# Altium PCB PCB1.PcbDoc
Units mil, origin at the board's own origin, x right, y up, seen from the top; angles counter-clockwise.
Board outline 1125 x 2025 mil, 2 copper layers (Top Layer, Bottom Layer); 32 components, 37 nets, 133 pads, 46 vias.
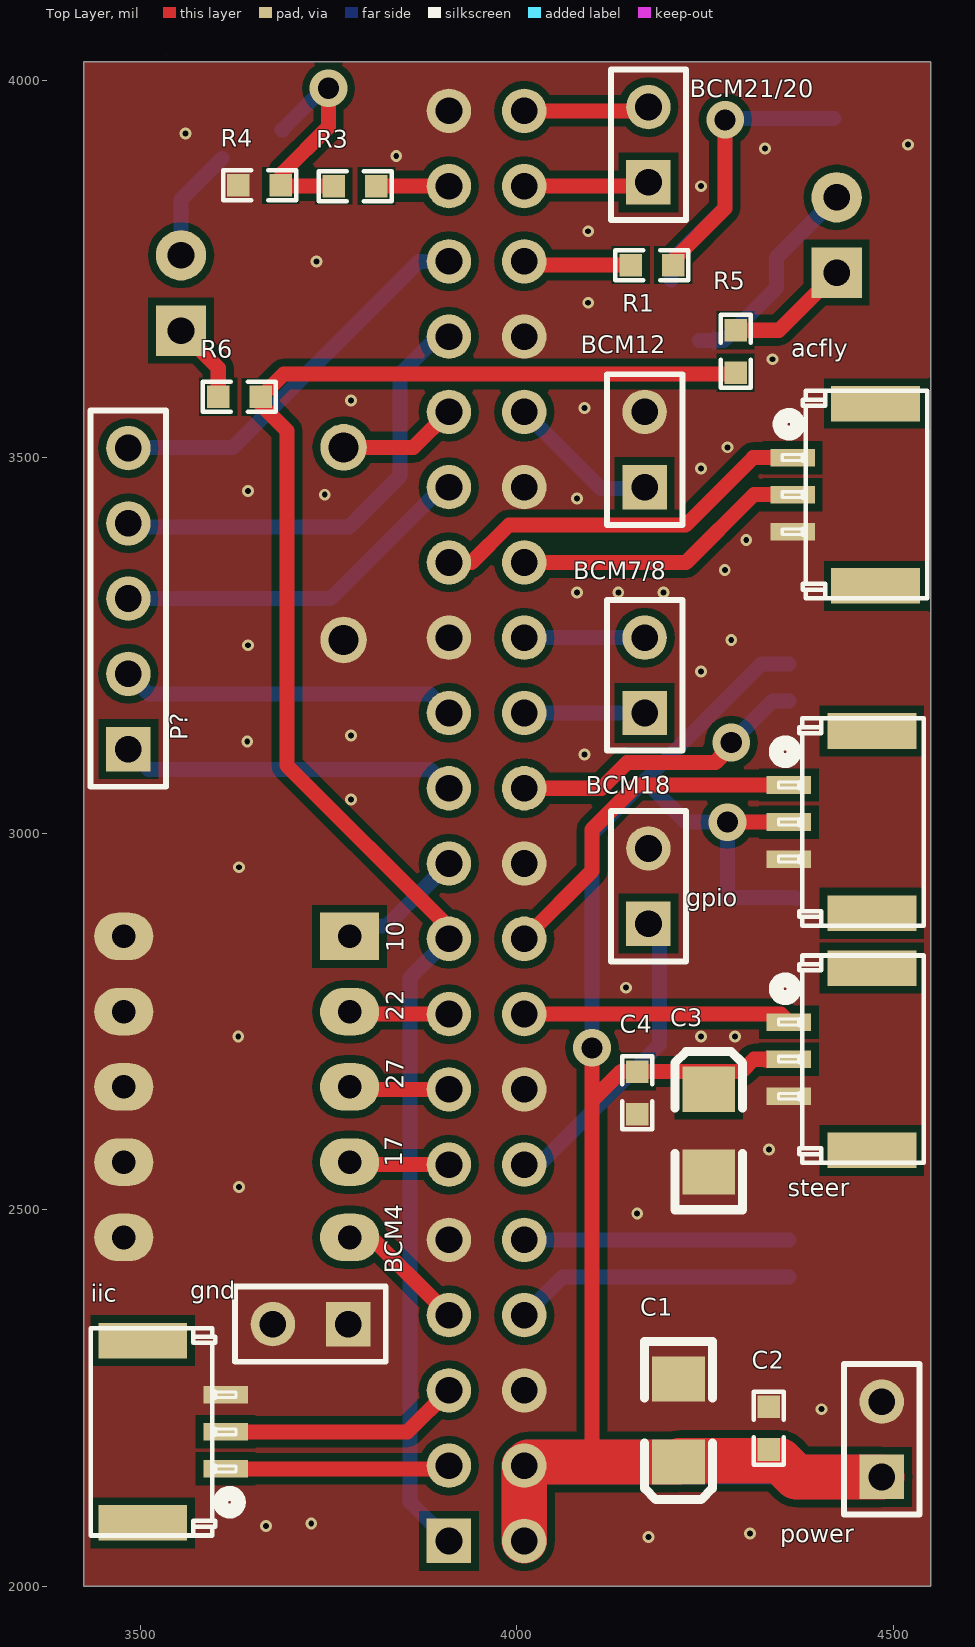
[diagram p0: Top Layer view]
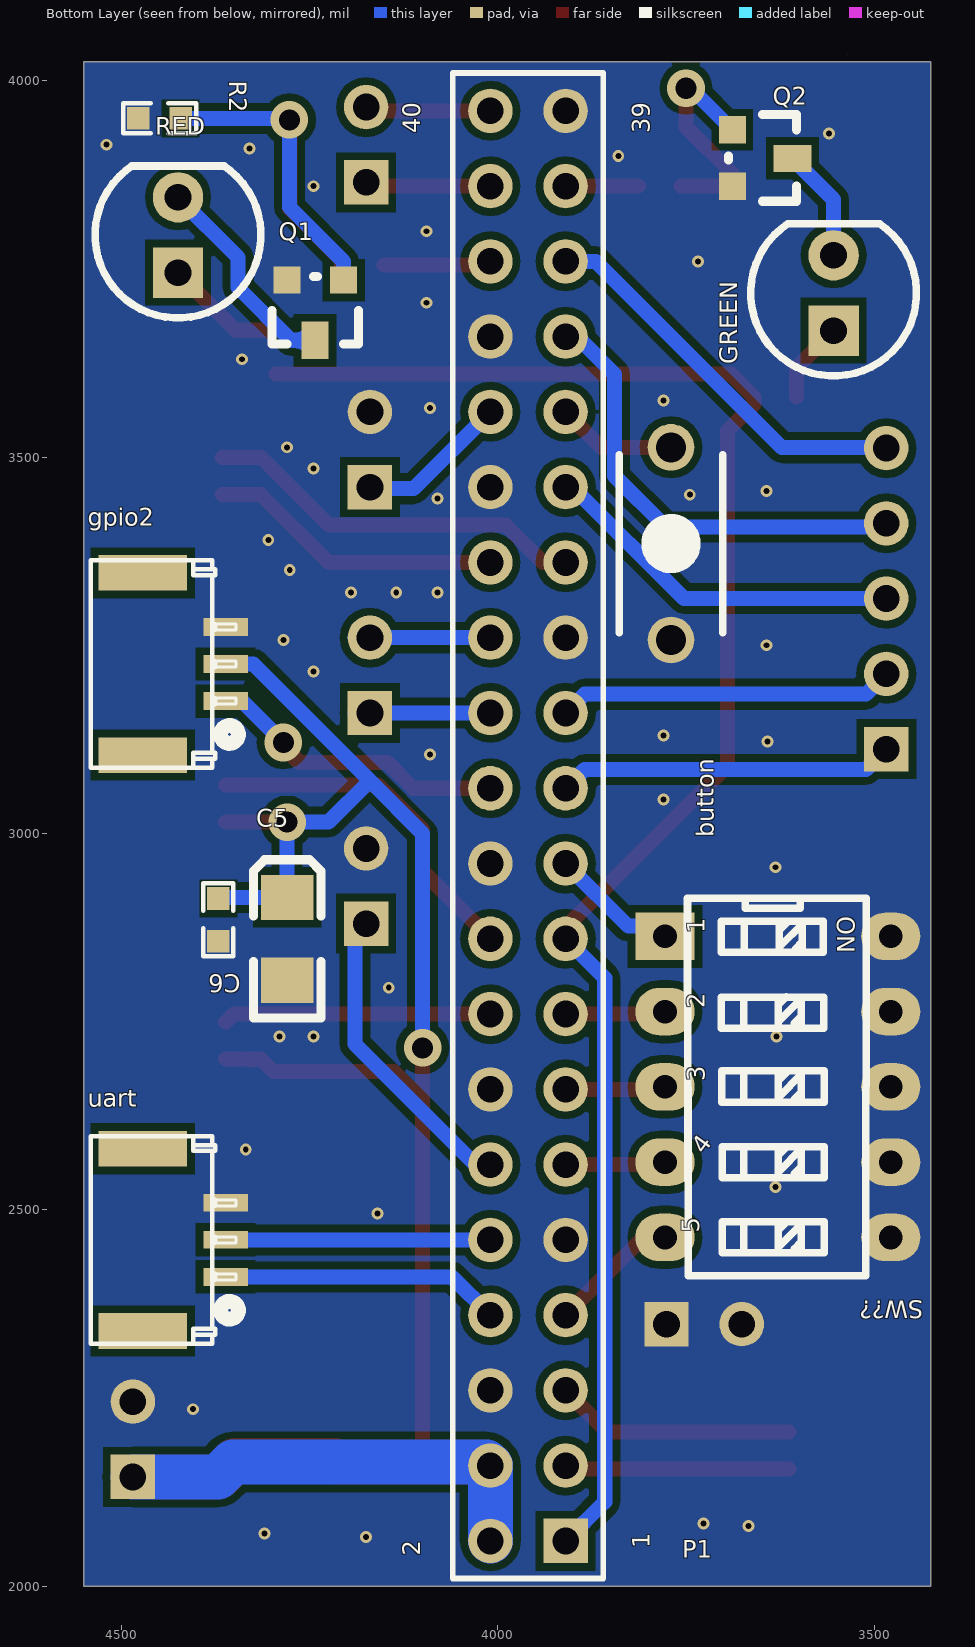
[diagram p1: Bottom Layer view, seen from below]

## Layer stack, top to bottom
Top Solder: solder mask 0.4, Solder Resist, Dk 3.5
Top Layer: signal copper 1.4
Dielectric 1: dielectric 12.6, FR-4, Dk 4.8
Bottom Layer: signal copper 1.4
Bottom Solder: solder mask 0.4, Solder Resist, Dk 3.5

## Board outline
3425,2000 3425,4025 4550,4025 4550,2000
cut-out: 3535,4035

## Design rules (kind name [scope] priority, off if disabled: settings)
Clearance [All] p1: gap=10 ignorepadtopadclearanceinfootprint=FALSE except(0: Arc-Hole Track-Hole SMDPad-Hole THPad-Hole Via-Hole Fill-Hole Poly-Hole Region-Hole Text-Hole)
HoleToHoleClearance [All] p1: gap=0 allowstackedmicrovias=TRUE
MinimumSolderMaskSliver [All] p1: minsoldermaskwidth=0
PolygonConnect [All] p1: connectstyle=Direct reliefconductorwidth=10 reliefentries=4 polygonreliefangle="90 Angle" airgapwidth=10
RoutingVias [All] p1: holewidth=28 width=50 viastyle="Through Hole" minholewidth=28 minwidth=50 maxholewidth=28 maxwidth=50
SilkToSilkClearance [All] p1: silktosilkclearance=0
SilkToSolderMaskClearance [IsPad] p1: minsilkscreentomaskgap=0 clearancetoexposedcopper=TRUE
SolderMaskExpansion [All] p1: expansion=4
Width [All] p1: maxlimit=150 minlimit=10 preferedwidth=20 minimp=50.000000 maximp=50.000000 favimp=50.000000
26 further rules are at their usual default settings.

## Components (designator, comment, footprint, x,y, rotation, side; value= is the part's Value field where it differs from the comment)
acfly "Header 3" GH1.25-LS-3P 4465,3450 r90 top
BCM7/8 "Header 2" HDR1X2 4170,3160 r90 top
BCM12 "Header 2" HDR1X2 4170,3460 r90 top
BCM18 "Header 2" HDR1X2 4175,2880 r90 top
BCM21/20 "Header 2" HDR1X2 4175,3865 r90 top
button "SW_PUSH" KEY_3x6 3770,3385 r270 bottom
C1 "47uF" 3216 4215,2205 r270 top
C2 "100nF" 0603P 4335,2210 r270 top
C3 "47uF" 3216 4255,2620 r90 top
C4 "100nF" 0603P 4160,2655 r90 top
C5 "47uF" 3216 4280,2875 r90 bottom
C6 "100nF" 0603P 4371.44,2885 r90 bottom
gnd "Header 2" HDR1X2 3776,2348 r180 top
gpio "Header 3" GH1.25-LS-3P 4460,3015 r90 top
gpio2 "Header 3" GH1.25-LS-3P 4460,3225 r270 bottom
GREEN "LED?" "LED 5MM-G" 3554,3718 r90 bottom
iic "Header 3" GH1.25-LS-3P 3515,2205 r270 top
P1 "Header 20X2" HDR2X20 3910,2060 r90 bottom locked
P? "Header 5" HDR1X5 3484,3112 r90 top
power "Battery" HDR1X2 4485,2145 r90 top
Q1 "SI2302 SOT23" SOT-23 4205,3735 r0 bottom
Q2 "SI2302 SOT23" SOT-23 3688.5,3934.87 r270 bottom
R1 "100R" 0603P 4180,3755 r180 top
R2 "100K" 0603P 4450,3950 r180 bottom
R3 "100R" 0603P 3785,3860 r0 top
R4 "100K" 0603P 3658,3861 r0 top
R5 "200R" 0603P 4290.85,3640 r90 top
R6 "200R" 0603P 3632,3580 r180 top
RED "LED?" "LED 5MM-R" 4425,3795 r90 bottom
steer "Header 3" GH1.25-LS-3P 4460,2700 r90 top
SW?? "DIP SWITCH-05" "DIP SWITCH-05" 3628,2663 r270 bottom
uart "Header 3" GH1.25-LS-3P 4460,2460 r270 bottom

## Footprints (in the part's own frame and the unit in brackets; to place one, negate y for a bottom-side part, rotate by r counter-clockwise, add the part's x,y. Pads: shape width x height; smd on the part's side, far side on the other; paste and mask are expansions set on the pad)
0603P [mil]
  rect 30x30 smd: 1(-28,0) 2(28.5,-0.06)
  silkscreen extent -48,-20 49,20
3216 [mil]
  rect 60x70 smd: 1(40,0) 2(-70,0)
  silkscreen extent -120,-45 90,45
"DIP SWITCH-05" [mm]
  rect 1.6x2 hole 0.8: 1(-5.086,-3.81)
  oval 1.6x2 hole 0.8: 2(-2.546,-3.81) 3(-0.006,-3.81) 4(2.534,-3.81) 5(5.074,-3.81) 6(5.074,3.81) 7(2.534,3.81) 8(-0.006,3.81) 9(-2.546,3.81) 10(-5.086,3.81)
  silkscreen extent -6.37,-3.05 6.37,2.98
GH1.25-LS-3P [mm] "A1257WR-S-3P"
  rect 1.2x3 smd: 0(-3.075,-0.3) 0(3.075,-0.3)
  rect 0.6x1.5 smd: 1(1.25,2.5) 2(0,2.5) 3(-1.25,2.5)
  silkscreen extent -3.5,-2.05 3.5,2.93, body extent -3.5,-2.15 3.5,2.25, height 4.2
HDR1X2 [mm] "Connector; Header; 2 Position"
  rect 1.5x1.5 hole 0.9: 1(0,0)
  round 1.5 hole 0.9: 2(2.54,0)
  silkscreen extent -1.27,-1.27 3.81,1.27
HDR1X5 [mm] "Connector; Header; 5 Position"
  rect 1.5x1.5 hole 0.9: 1(0,0)
  round 1.5 hole 0.9: 2(2.54,0) 3(5.08,0) 4(7.62,0) 5(10.16,0)
  silkscreen extent -1.27,-1.27 11.43,1.27
HDR2X20 [mm] "Connector; Header; 20x2 Position"
  rect 1.5x1.5 hole 0.9: 1(0,0)
  round 1.5 hole 0.9: 2(0,2.54) 3(2.54,0) 4(2.54,2.54) 5(5.08,0) 6(5.08,2.54) 7(7.62,0) 8(7.62,2.54) 9(10.16,0) 10(10.16,2.54) 11(12.7,0) 12(12.7,2.54) 13(15.24,0) 14(15.24,2.54) 15(17.78,0) 16(17.78,2.54) 17(20.32,0) 18(20.32,2.54) 19(22.86,0) 20(22.86,2.54) 21(25.4,0) 22(25.4,2.54) 23(27.94,0) 24(27.94,2.54) 25(30.48,0) 26(30.48,2.54) 27(33.02,0) 28(33.02,2.54) 29(35.56,0) 30(35.56,2.54) 31(38.1,0) 32(38.1,2.54) 33(40.64,0) 34(40.64,2.54) 35(43.18,0) 36(43.18,2.54) 37(45.72,0) 38(45.72,2.54) 39(48.26,0) 40(48.26,2.54)
  silkscreen extent -1.27,-1.27 49.53,3.81
KEY_3x6 [mil] "KEY_MID"
  round 62 hole 40: 1(-127.95,0) 2(127.95,0)
  silkscreen extent -118,-69 118,69
"LED 5MM-G" [mm] "绿色5mm直插LED"
  rect 1.7x1.7 hole 0.9: 1(-1.27,0)
  round 1.7 hole 0.9: 2(1.27,0)
  silkscreen extent -2.8,-2.8 2.33,2.8, body extent -1.98,-0.8 2.08,0.8, height 4.5
"LED 5MM-R" [mm] "红色5mm直插LED"
  rect 1.7x1.7 hole 0.9: 1(-1.27,0)
  round 1.7 hole 0.9: 2(1.27,0)
  silkscreen extent -2.8,-2.8 2.33,2.8, body extent -1.98,-0.8 2.08,0.8, height 4.5
SOT-23 [mil]
  rect 36x36 smd: 1(0,0) 2(75,0)
  rect 36x50 smd: 3(38,80)
  silkscreen extent -20,-5 95,85

## Part data
acfly gpio gpio2 iic steer uart: "Header, 3-Pin", LatestRevisionDate=17-Jul-2002, LatestRevisionNote="Re-released for DXP Platform.", Publisher="Altium Limited"
BCM7/8 BCM12 BCM18 BCM21/20 gnd: "Header, 2-Pin", LatestRevisionDate=17-Jul-2002, LatestRevisionNote="Re-released for DXP Platform.", Publisher="Altium Limited"
button: library part KEY
C1 C3 C5: library part CAP
C2 C4 C6: library part C
GREEN RED: library part LED
P1: "Header, 20-Pin, Dual row", LatestRevisionDate=17-Jul-2002, LatestRevisionNote="Re-released for DXP Platform.", Publisher="Altium Limited"
P?: "Header, 5-Pin", LatestRevisionDate=17-Jul-2002, LatestRevisionNote="Re-released for DXP Platform.", Publisher="Altium Limited"
power: library part "Header 2", "Header, 2-Pin", LatestRevisionDate=17-Jul-2002, LatestRevisionNote="Re-released for DXP Platform.", Publisher="Altium Limited"
Q1 Q2: library part NMOS
R1 R2 R3 R4 R5 R6: library part R

## Via types
v1: diameter 15.75, hole 7.87, Top Layer to Bottom Layer, 41 vias
v2: diameter 50, hole 28, Top Layer to Bottom Layer, 5 vias

## Nets (pads, with @x,y where several pads share a name; then routed paths per layer and width w, separated by ;. In a path a pad name is that pad's centre, name@x,y a point inside that pad or via, vN(x,y) a via of type N, cw(c..) or ccw(c..) an arc to the next point about the centre after c; other vN are vias at no path point)
+3V3: P1.1 P1.17 R5.1 R6.1 | length 2314.3
  Top Layer w20: P1.17 3910,2875 3695,3090 3695,3535 3660,3570 R6.1 3690.47,3610.47 R5.1@4295,3610.47
  Bottom Layer w20: P1.1 3858,2112 3858,2808 P1.17
+5V: C1.1 C2.2 C3.1 C4.2 C5.1 C6.2 gpio2.2 gpio.2 P1.2 P1.4 power.1 steer.2 | length 3066.5
  Top Layer w20: 4100,2165 4100,2645 ; v2(4100,2715) 4100,2645 ; v2@4270.06,3024.94 v2(4280,3015) gpio.2 ; steer.2 4315,2700 4298.5,2683.5 C4.2 4138.5,2683.5 4100,2645
  Top Layer w60: P1.2 P1.4 4015,2165 4100,2165 C1.1 4216.5,2166.5 4349.94,2166.5 4371.44,2145 power.1
  Bottom Layer w20: v2(4100,2715) 4100,3000 4170,3070 ; gpio2.2 4325,3225 4170,3070 ; C6.2 4369.87,2915 C5.1 v2(4280,3015) 4225,3015 4170,3070
  Bottom Layer w60: P1.2 P1.4 4015,2165 4352,2165 4372,2145 power.1
BCM0: acfly.1 P1.27 | length 514.2
  Top Layer w20: P1.27 3939.96,3360 3989.49,3409.53 4224.53,3409.53 4314.21,3499.21 acfly.1
BCM1: acfly.2 P1.28 | length 393.9
  Top Layer w20: P1.28 4225,3360 4315,3450 acfly.2
BCM2: iic.1 P1.3 | length 298.3
  Top Layer w20: iic.1 3905.79,2155.79 P1.3
BCM3: iic.2 P1.5 | length 319.4
  Top Layer w20: iic.2 3855,2205 P1.5
BCM4: P1.7 SW??.5 | length 171.4
  Top Layer w20: SW??.5@3787,2476.76 3793.24,2476.76 P1.7
BCM5: P1.29 P?.3 | length 487.3
  Bottom Layer w20: P?.3 3752.83,3312 3900.83,3460 P1.29
BCM6: button.1 P1.31 | length 159.5
  Top Layer w20: button.1 3862.95,3512.95 P1.31
BCM7: BCM7/8.2 P1.26 | length 180
  Bottom Layer w20: P1.26 BCM7/8.2@4190,3260
BCM8: BCM7/8.1 P1.24 | length 180
  Bottom Layer w20: P1.24 BCM7/8.1@4190,3160
BCM9: P1.21 P?.1 | length 447.5
  Bottom Layer w20: P?.1 3511,3085 3885,3085 P1.21
BCM10: P1.19 SW??.1 | length 157.5
  Bottom Layer w20: SW??.1@3787,2876.76 3826.76,2876.76 P1.19
BCM11: P1.23 P?.2 | length 447.5
  Bottom Layer w20: P?.2 3511,3185 3885,3185 P1.23
BCM12: BCM12.1 P1.32 | length 202.3
  Bottom Layer w20: P1.32 4112.05,3457.95 BCM12.1@4170,3457.95
BCM13: P1.33 P?.4 | length 611.9
  Bottom Layer w20: P?.4 3489,3407 3777,3407 3845,3475 3845,3610 3895,3660 P1.33
BCM14: P1.8 uart.1 | length 372.6
  Bottom Layer w20: P1.8 4060.79,2410.79 uart.1
BCM15: P1.10 uart.2 | length 351.6
  Bottom Layer w20: P1.10 uart.2
BCM16: P1.36 R1.2 | length 143.5
  Top Layer w20: P1.36 4014.94,3755.06 R1.2
BCM17: P1.11 SW??.4 | length 129.9
  Top Layer w20: SW??.4@3787,2576.76 3803.76,2560 P1.11
BCM18: BCM18.1 P1.12 | length 406.3
  Bottom Layer w20: P1.12 4030,2560 4190,2720 BCM18.1@4190,2880
BCM19: P1.35 P?.5 | length 528.7
  Bottom Layer w20: P?.5 3484.5,3512.5 3622.5,3512.5 3870,3760 P1.35
BCM20: BCM21/20.1 P1.38 | length 167.1
  Top Layer w20: P1.38 4170,3860 BCM21/20.1
BCM21: BCM21/20.2 P1.40 | length 167.1
  Top Layer w20: P1.40 4170,3960 BCM21/20.2
BCM22: P1.15 SW??.2 | length 129.9
  Top Layer w20: SW??.2@3787,2776.76 3803.76,2760 P1.15
BCM23: P1.16 steer.1 | length 356
  Top Layer w20: P1.16 4350.79,2760 steer.1
BCM24: gpio.1 P1.18 | length 468.4
  Top Layer w20: P1.18 4100,2950 4100,3005 4159.21,3064.21 gpio.1
BCM25: gpio2.1 P1.22 | length 403
  Top Layer w20: P1.22 4112.57,3060 4146.79,3094.21 4264.28,3094.21 4285,3114.94 v2(4285,3120.79)
  Bottom Layer w20: v2(4285,3120.79) 4340,3175.79 gpio2.1
BCM26: P1.37 R3.2 | length 96.5
  Top Layer w20: R3.2 3909.94,3859.94 P1.37
BCM27: P1.13 SW??.3 | length 144.9
  Top Layer w20: SW??.3@3787,2676.76 3803.76,2660 P1.13 P1.13@3910,2675
GND: acfly.3 BCM12.2 BCM18.2 button.2 C1.2 C2.1 C3.2 C4.1 C5.2 C6.1 gnd.1 gnd.2 gpio2.3 gpio.3 iic.3 P1.6 P1.9 P1.14 P1.20 P1.25 P1.30 P1.34 P1.39 power.2 Q1.2 Q2.2 R2.1 R4.1 steer.3 SW??.6 SW??.7 SW??.8 SW??.9 SW??.10 uart.3
  other v1: 4175,2065 4310,2070 3667,2080 3727,2083 4405,2235 4160.06,2495 3631,2530 4335,2580 3630,2730 4245,2730 4290,2730 4145,2795 3631,2955 3780,3045 4090,3105 3642,3122 3780,3130 4245,3215 3643,3250 4285,3257.05 4080,3320 4135,3320 4195,3320 4276.5,3350 4305,3390 4080,3445 3745,3450 3643,3455 4245,3485 4280,3512.95 4090,3565 3780,3575 4340,3630 4095,3705 3734,3760 4095,3800 4245,3859.87 3840,3900 4330,3910 4520,3915 3560,3930
NetGREEN_1: GREEN.1 R6.2 | length 108.4
  Top Layer w20: GREEN.1 3603.5,3618.5 R6.2
NetGREEN_2: GREEN.2 Q2.3 | length 151.4
  Bottom Layer w20: GREEN.2 3554,3842.37 Q2.3
NetQ1_1: Q1.1 R1.1 R2.2 | length 609.7
  Top Layer w20: R1.1 4208,3761.63 4276.5,3830.13 4276.5,3947.5 v2(4277,3948)
  Bottom Layer w20: Q1.1 4205,3760 4277,3832 v2(4277,3948) 4278.94,3949.94 R2.2
NetQ1_3: Q1.3 RED.2 | length 284.1
  Bottom Layer w20: Q1.3 4275,3655 4345,3725 4345,3765 RED.2
NetQ2_1: Q2.1 R3.1 R4.2 | length 308.5
  Top Layer w20: v2(3750,3990) 3750,3938.63 3688.5,3877.13 3688.5,3859.87 3688.63,3860 R3.1
  Bottom Layer w20: Q2.1 3743.63,3990 v2(3750,3990)
NetR5_2: R5.2 RED.1 | length 165.8
  Top Layer w20: R5.2 4348.5,3668.5 RED.1
pads on no net: acfly.0 gpio2.0 gpio.0 iic.0 steer.0 uart.0

## Polygon pours and split planes (outlines as drawn)
GND on Bottom Layer "Top Layer-No Net1" (solid, remove dead copper, pour order 4): 3425,2000 3425,4025 4550,4025 4550,2000
GND on Top Layer "Top Layer-No Net" (solid, remove dead copper, pour order 3): 3425,2000 3425,4025 4550,4025 4550,2000

## Silkscreen, mask and mechanical layers (free items; w line width, h text height)
Top Overlay:
  text "27     22     10" at 3858,2660 h40 r90
  text "BCM4     17" at 3856,2415 h40 r90
Bottom Solder:
  lines w60: 4015,2165 4350,2165 4370,2145 4485,2145
Mechanical 1:
  the board outline again, w10

## Text inside footprints (layer, text, board x,y; h text height)
P1: Bottom Overlay "1" at 3790,2050 h40 r270; Bottom Overlay "2" at 4095,2040 h40 r270; Bottom Overlay "40" at 4095,3930 h40 r270; Bottom Overlay "39" at 3790,3930 h40 r270
SW??: Bottom Overlay "1" at 3717.36,2867.03 h40 r270; Bottom Overlay "2" at 3716.96,2767.53 h40 r270; Bottom Overlay "3" at 3716.96,2670.74 h40 r270; Bottom Overlay "ON" at 3557.15,2890.03 h40 r90; Bottom Overlay "4" at 3719.64,2567.95 h40 r306; Bottom Overlay "5" at 3724.46,2469.14 h40 r270